# Altium PCB main_btm.PcbDoc
Units mil, origin at the board's own origin, x right, y up, seen from the top; angles counter-clockwise.
Board outline 2360 x 2360 mil, 2 copper layers (Top Layer, Bottom Layer); 35 components, 28 nets, 133 pads, 30 vias.
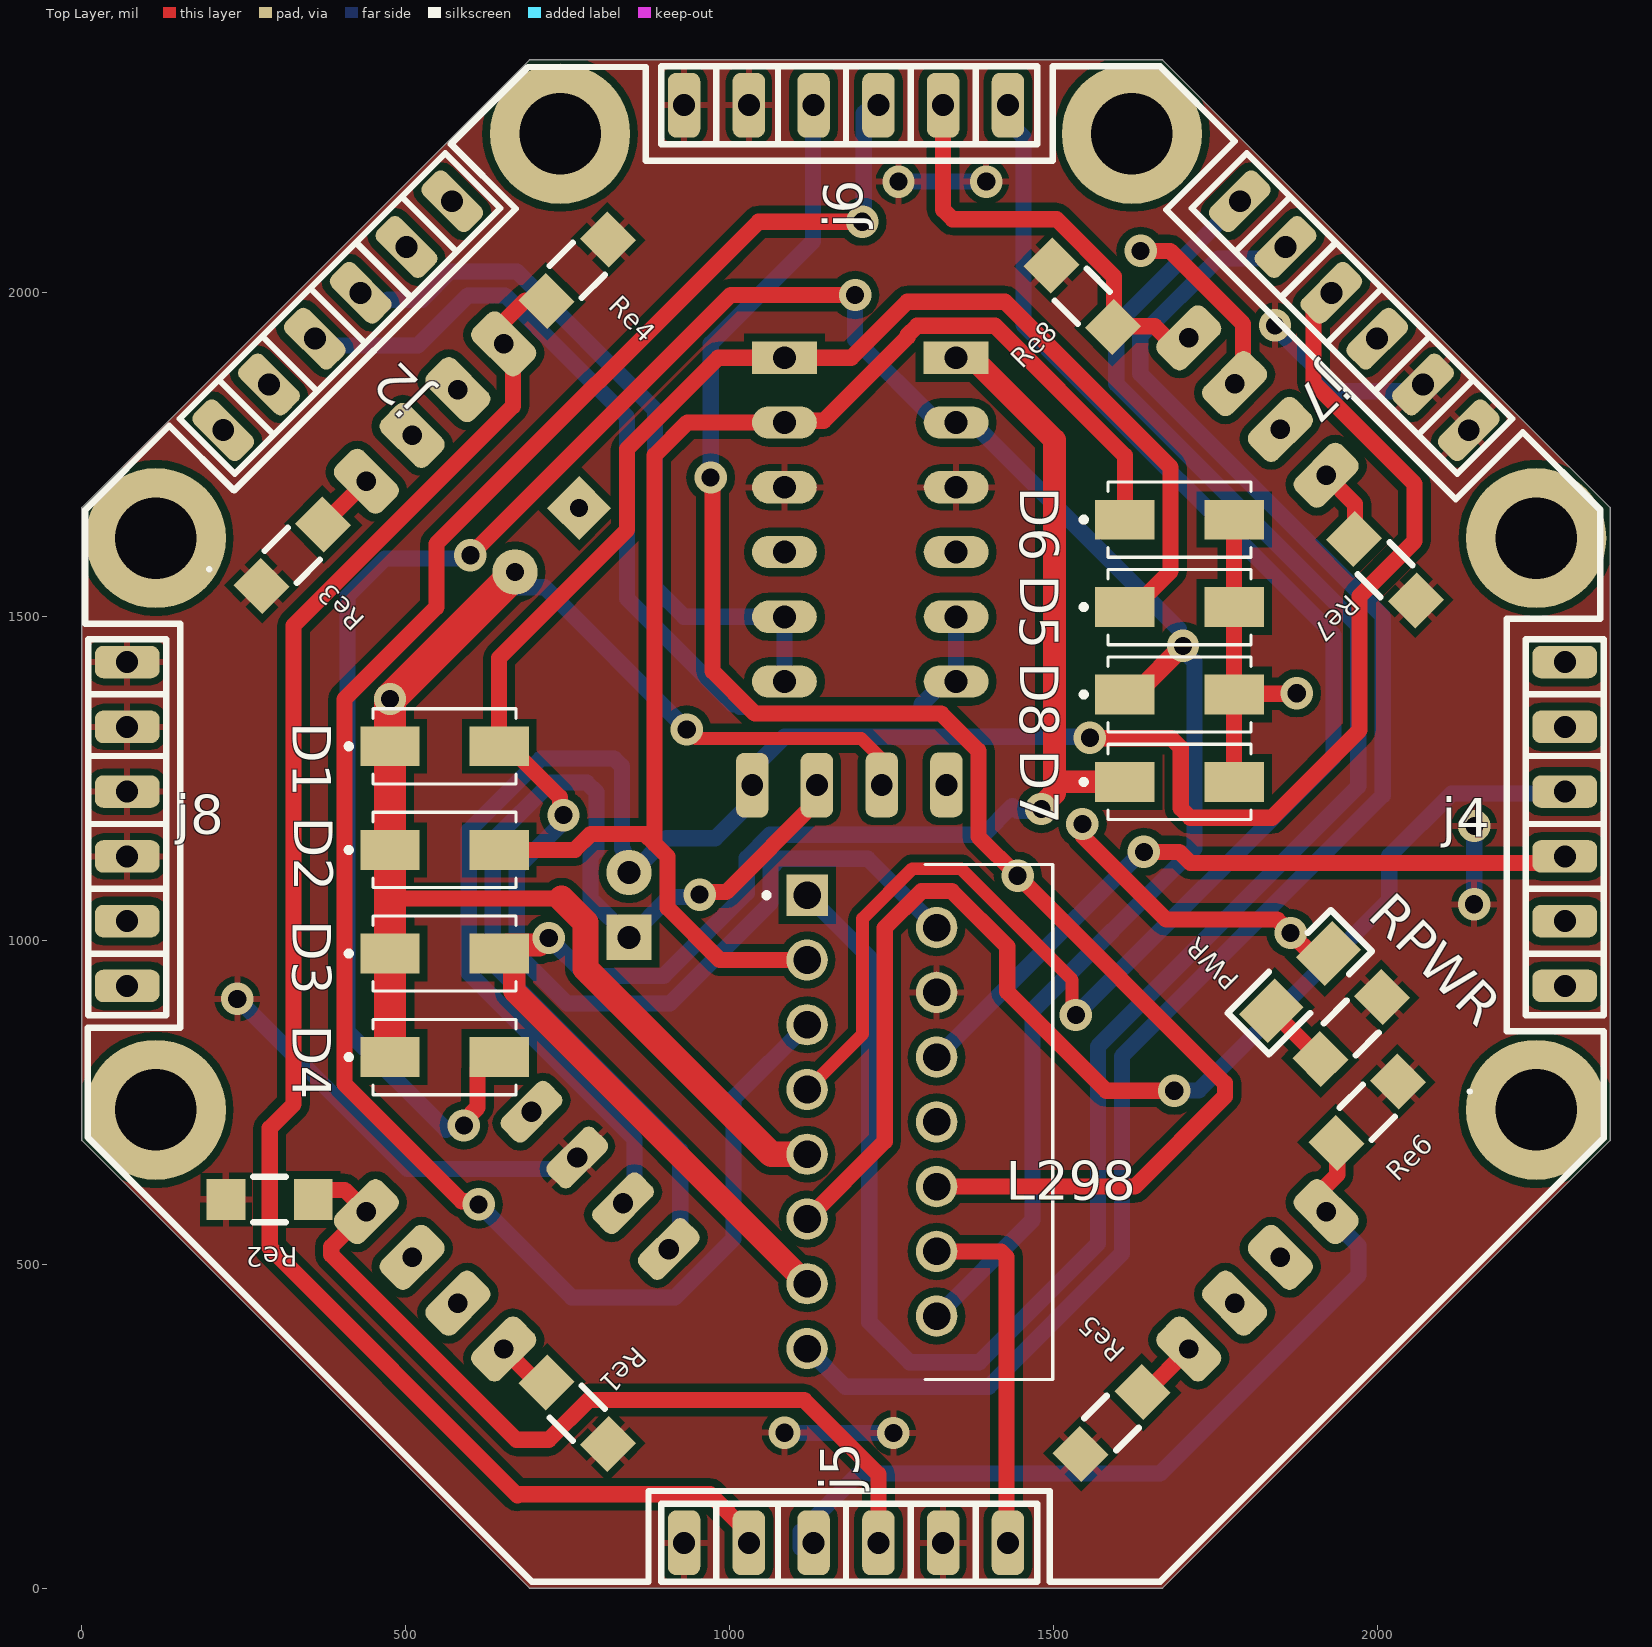
[diagram p0: Top Layer view]
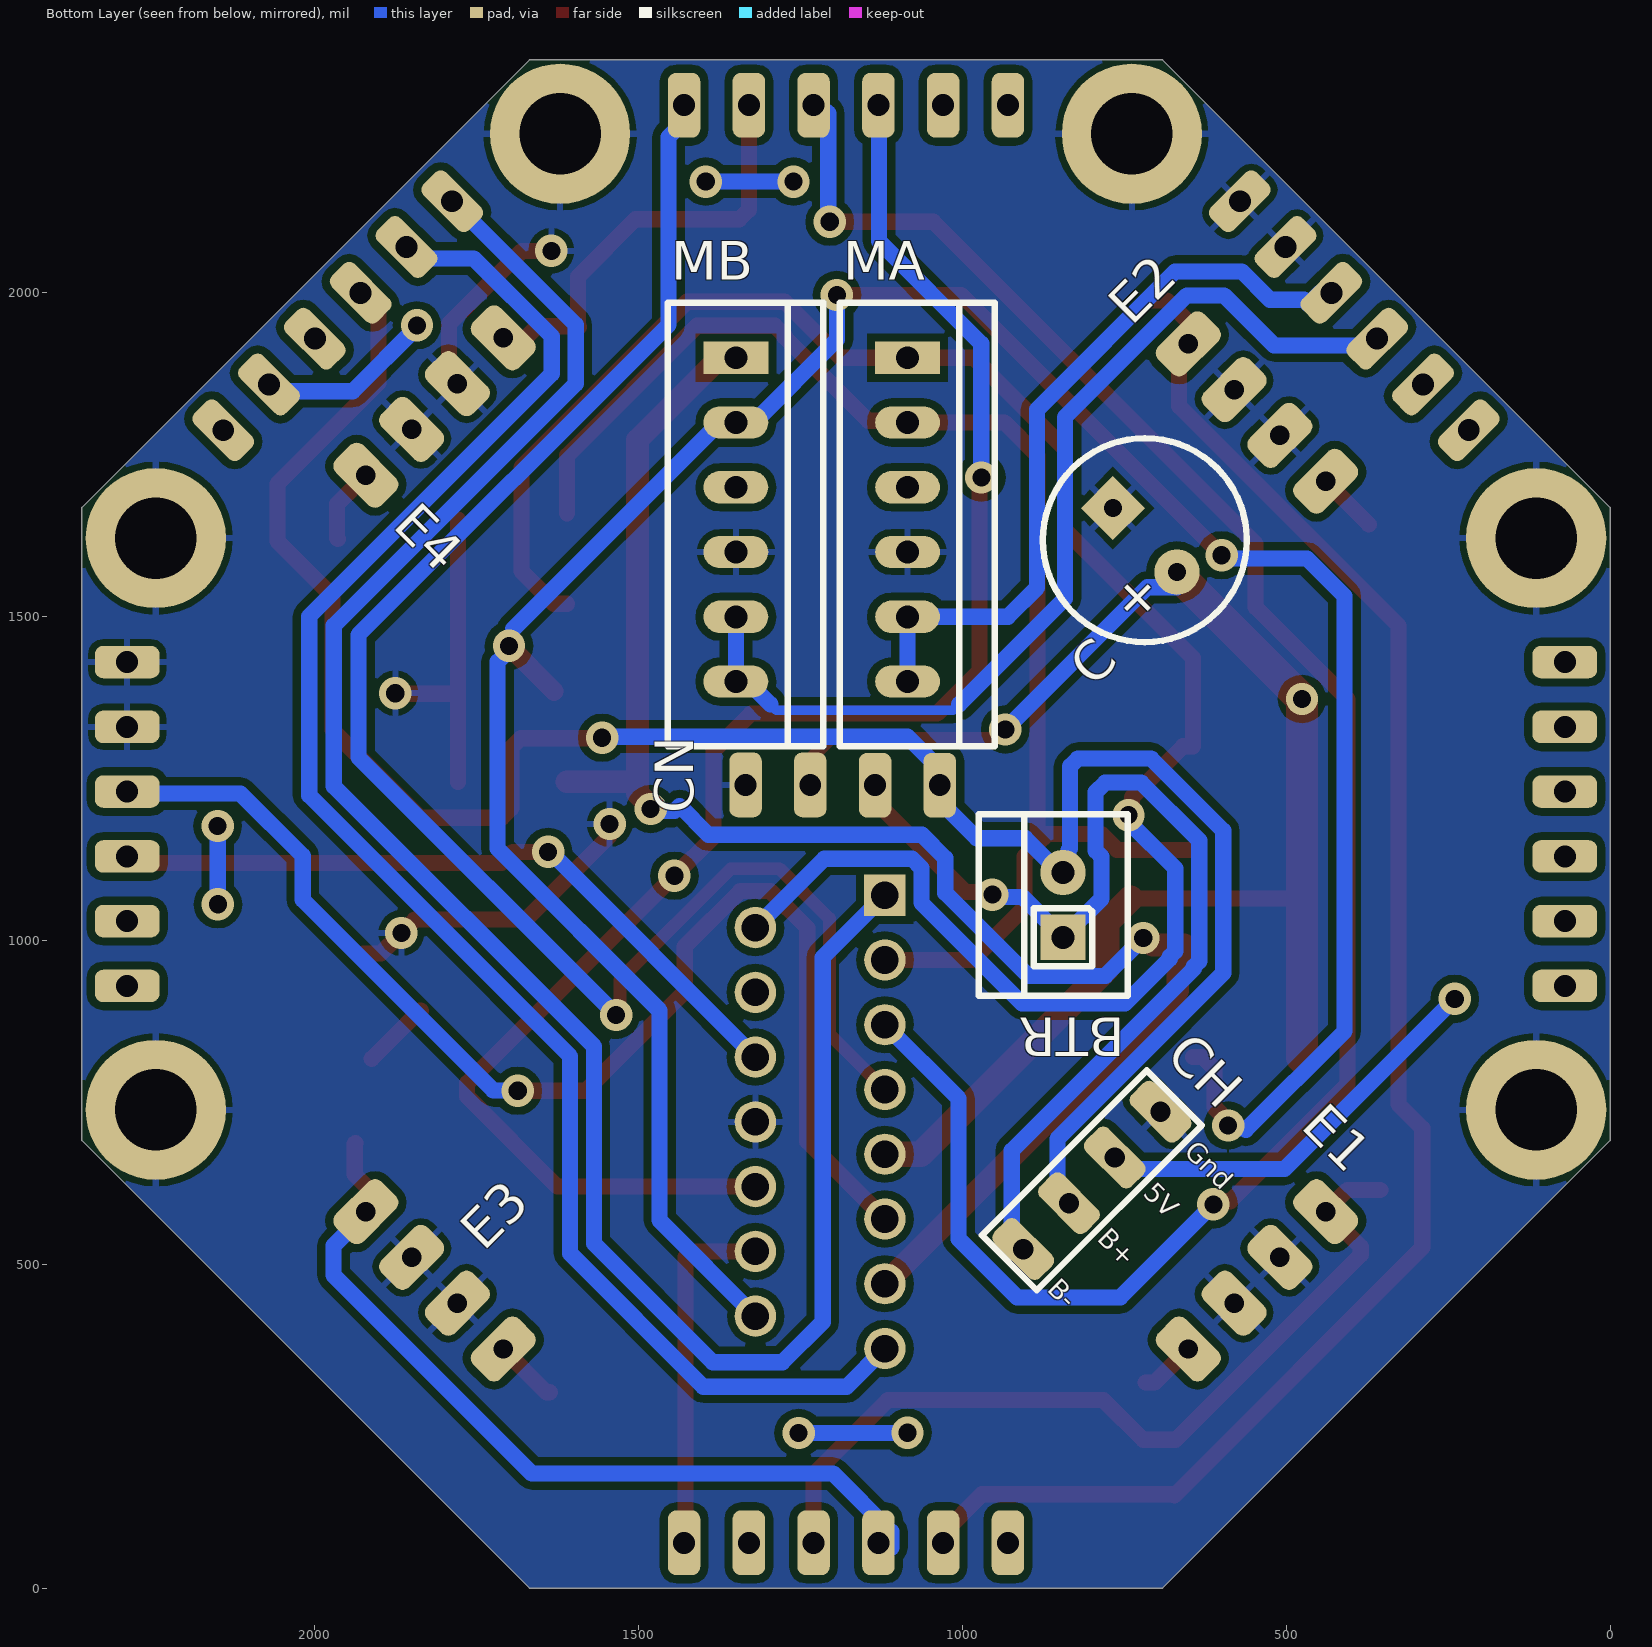
[diagram p1: Bottom Layer view, seen from below]

## Layer stack, top to bottom
Top Solder: solder mask 0.4, Solder Resist, Dk 3.5
Top Layer: signal copper 1.4
Dielectric 1: dielectric 12.6, FR-4, Dk 4.8
Bottom Layer: signal copper 1.4
Bottom Solder: solder mask 0.4, Solder Resist, Dk 3.5

## Board outline
0,691.23 0,1668.77 691.23,2360 1668.77,2360 2360,1668.77 2360,691.23 1668.77,0 691.23,0

## Design rules (kind name [scope] priority, off if disabled: settings)
Clearance Clearance_2 [OnLayer('Bottom Overlay')] p1: gap=1 ignorepadtopadclearanceinfootprint=FALSE
Clearance Clearance_1 [OnLayer('Top Overlay')] p2: gap=1 ignorepadtopadclearanceinfootprint=FALSE
Clearance [All] p3: gap=12 ignorepadtopadclearanceinfootprint=FALSE except(18: Fill-Hole Poly-Hole Region-Hole)
PolygonConnect [All] p1: connectstyle=Relief reliefconductorwidth=10 reliefentries=4 polygonreliefangle="90 Angle" airgapwidth=10
RoutingTopology [All] p1: topology=Daisy_Simple
RoutingVias [All] p1: holewidth=28 width=50 viastyle="Through Hole" minholewidth=28 minwidth=50 maxholewidth=28 maxwidth=50
SolderMaskExpansion [All] p1: expansion=4 istentingtop=FALSE
Width [InNet('Vss')] p1: maxlimit=100 minlimit=15 preferedwidth=15 minimp=50.000000 maximp=50.000000 favimp=50.000000
29 further rules are at their usual default settings.

## Classes and differential pairs
component class Encoder_Sheet: E1 E2 E3 E4 Re1 Re2 Re3 Re4 Re5 Re6 Re7 Re8
component class Power_Sheet: BTR CH CN PWR RPWR
component class Motors_Sheet: C D1 D2 D3 D4 D5 D6 D7 D8 L298 MA MB

## Components (designator, comment, footprint, x,y, rotation, side; value= is the part's Value field where it differs from the comment)
BTR "JST_B2B" JST_B2B 845,1105 r0 bottom
C "cap_elec8115" CAP_8115 668.93,1568.93 r45 bottom value=220uF
CH "charger" 1S_Charger 461,78.16 r225 bottom
CN "DC-DC Converter" "DC-DC Conv" 1035.18,1240 r90 bottom
D1 "M7" 1N4007 560,1300 r270 top
D2 "M7" 1N4007 560,1140 r270 top
D3 "M7" 1N4007 560,980 r270 top
D4 "M7" 1N4007 560,820 r270 top
D5 "M7" 1N4007 1695,1515 r270 top
D6 "M7" 1N4007 1695,1650 r270 top
D7 "M7" 1N4007 1695,1245 r270 top
D8 "M7" 1N4007 1695,1380 r270 top
E1 "100th" pin4header 651.42,369.29 r135 bottom
E2 "100th" pin4header 439.29,1709.29 r45 bottom
E3 "100th" pin4header 1709.29,369.29 r45 bottom
E4 "100th" pin4header 1921.42,1718.58 r135 bottom
j2 "100th" pin6header 571.89,2141.67 r135 top
j4 "100th" pin6header 2290,930 r0 top
j5 "100th" pin6header 1430,70 r90 top
j6 "100th" pin6header 1430,2290 r90 top
j7 "100th" pin6header 1788.11,2141.65 r225 top
j8 "100th" pin6header 70,930 r0 top
L298 "L298N" L298N 1120,1070 r0 top
MA "JST_B6B" JST_B6B 1085,1400 r180 bottom
MB "JST_B6B" JST_B6B 1350,1400 r180 bottom
PWR "3.2x1.6" LED3_2X1_6 1925,980 r225 top
Re1 "1206" 1206 765,270 r315 top value=220
Re2 "1206" 1206 290,600 r180 top
Re3 "1206" 1206 325,1595 r225 top value=220
Re4 "1206" 1206 765,2035 r45 top
Re5 "1206" 1206 1590,255 r225 top value=220
Re6 "1206" 1206 1985,735 r45 top
Re7 "1206" 1206 2012.4,1572.6 r315 top value=220
Re8 "1206" 1206 1545,1995 r135 top
RPWR "1206" 1206 1960,865 r45 top value=220

## Footprints (in the part's own frame and the unit in brackets; to place one, negate y for a bottom-side part, rotate by r counter-clockwise, add the part's x,y. Pads: shape width x height; smd on the part's side, far side on the other; paste and mask are expansions set on the pad)
1N4007 [mm]
  rect 1.56x2.33 smd: A(0,2.14) C(0,-2.14)
  silkscreen extent -1.48,-3.85 1.48,2.8, body extent -1.56,-2.65 1.55,2.65, height 2.47
1S_Charger [mm]
  rrect50% 2.54x1.27 hole 0.8: B+(-16,2.54) B-(-16,0) GND(-16.002,7.62) Vout(-16,5.08)
  silkscreen extent -17.53,-0.76 -14.48,8.38
1206 [mm]
  rect 1.52x1.6 smd: 1(-1.71,0) 2(1.71,0)
  silkscreen extent -0.63,-0.89 0.63,0.89, body extent -1.6,-0.8 1.6,0.8, height 0.7
CAP_8115 [mil]
  rect 70x70 hole 27.56: neg(140,0)
  round 70 hole 27.56: pos(0,0)
  silkscreen extent -87,-157 227,157, body extent -87,-157 227,157, height 453
"DC-DC Conv" [mm]
  rrect50% 2.54x1.27 hole 0.86: B+(0,0) B-(0,2.535) Vout+(0.01,5.08) Vout-(0.01,7.615)
  body extent -1.27,-1.27 1.27,8.89, height 8.38
JST_B2B [mil]
  round 70 hole 35.43: 1(0,0)
  rect 70x70 hole 35.43: 2(0,100)
  silkscreen extent -100,-90 130,190, body extent -98,-91 132,191, height 284
JST_B6B [mm]
  rrect100% 2.54x1.27 hole 0.9: 1(0,0) 2(0,2.54) 3(0,5.08) 4(0,7.62) 5(0,10.16)
  rect 2.54x1.27 hole 0.9: 6(0,12.7)
  silkscreen extent -2.67,-2.54 3.43,14.86, body extent -2.54,-2.41 3.3,14.76, height 7.21
L298N [mm]
  rect 1.62x1.62 hole 1.08: 1(0,0)
  round 1.62 hole 1.08: 2(5.08,-1.27) 3(0,-2.54) 4(5.08,-3.81) 5(0,-5.08) 6(5.08,-6.35) 7(0,-7.62) 8(5.08,-8.89) 9(0,-10.16) 10(5.08,-11.43) 11(0,-12.7) 12(5.08,-13.97) 13(0,-15.24) 14(5.08,-16.51) 15(0,-17.78)
  silkscreen extent -1.69,-18.99 9.63,1.21, body extent -0.25,-19.05 9.64,1.15, height 20.68
LED3_2X1_6 [mm]
  rect 2x1.6 smd: a(3.175,0) c(0,0)
  silkscreen extent -1.27,-1.14 4.45,1.14, body extent -0.08,-0.8 3.12,0.8, height 1.1
pin4header [mil]
  rrect50% 60x100 hole 30: 1(0,0) 2(100,0) 3(200,0) 4(300,0)
  body extent -50,-50 350,50, height 98
pin6header [mm]
  rrect50% 2.54x1.27 hole 0.86: 1(0,0) 2(0,2.54) 3(0,5.08) 4(0,7.62) 5(0,10.16) 6(0,12.7)
  silkscreen extent -1.52,-1.14 1.52,13.59, body extent -1.2,-1.4 1.2,13.84, height 8.35

## Part data
D1 D2 D3 D4 D5 D6 D7 D8: library part 1N4007
E1 E2 E3 E4: library part Pin4Header
j2 j4 j5 j6 j7 j8: library part pin6header, System=Connector
PWR: library part led

## Free pads (board coordinates)
  round 216.54 hole 125.98: c(114.17,738.52) c(114.17,1621.48) c(738.52,2245.83) c(1621.48,2245.83) c(2245.83,738.52) c(2245.83,1621.48)

## Via types
v1: diameter 50, hole 28, Top Layer to Bottom Layer, 30 vias

## Nets (pads, with @x,y where several pads share a name; then routed paths per layer and width w, separated by ;. In a path a pad name is that pad's centre, name@x,y a point inside that pad or via, vN(x,y) a via of type N, cw(c..) or ccw(c..) an arc to the next point about the centre after c; other vN are vias at no path point)
+5: CH.Vout j5.2 j5.6 j6.5 j6.6 j7.5 j7.6 j8.3 j8.4 j8.5 j8.6 L298.4 MA.4 MB.4 Re1.2 Re2.2 Re3.2 Re4.2 Re5.2 Re6.2 Re7.2 Re8.2 RPWR.2 | length 1342.6
  Bottom Layer w25: v1(240,910) 502.68,647.32 747.32,647.32 CH.Vout ; v1(1085,240) 1085.25,239.75 1252.92,239.75 v1(1253.17,239.5) ; v1(1261,2172) v1(1396.5,2172) ; v1(1842.5,1950) 1842.5,1947.5 1941.8,1848.2 2060.34,1848.2 j7.5 ; v1(2150,1056) 2150.18,1056.18 2150.18,1176.82 v1(2150.36,1177)
B+: BTR.1 CH.B+ CN.B+ j7.3 | length 3324.2
  Top Layer w25: v1(1556.54,1313.24) 1557.34,1312.44 1682.36,1312.44 1697,1297.8 1697,1204.44 1711.64,1189.79 1837.79,1189.79 1973,1325 1973,1532 2057.88,1616.88 2057.88,1705.12 1901.9,1861.1 1901.9,1972.61 j7.3@1919.57,1990.28
  Bottom Layer w25: CH.B+ 853.39,611.97 853.39,693.96 597.5,949.85 597.5,1169.83 708.67,1281 822.25,1281 834,1269.25 834,1142.14 836.39,1139.76 836.39,1113.61 BTR.1 849.83,1105 902.88,1158.05 978.23,1158.05 1035.18,1215 CN.B+ 1035.18,1265 1085.06,1314.88 1554.9,1314.88 v1(1556.54,1313.24)
GND: C.neg CH.GND CN.Vout- D5.A D6.A D7.A D8.A E1.2 E1.3 E2.2 E2.3 E3.2 E3.3 E4.2 E4.3 j2.1 j2.2 j4.5 j4.6 L298.8 MA.3 MB.3 pad.c PWR.c | length 1315.3
  Top Layer w25: j2.1 j2.1@589.57,2123.99 ; E2.3 E2.3@594.85,1836.57 ; v1(1545,1180) 1545,1162 1674.62,1032.38 1845.93,1032.38 ; v1(1635,2065) 1680.36,2065 1793,1952.36 1793,1927 1793.19,1926.81 1793.19,1873.19 E4.3 ; D7.A D8.A D5.A D6.A ; D8.A@1781.75,1382.5 1783.09,1381.16 1875.16,1381.16 v1(1876,1382) ; v1@1851.43,1026.88 v1(1866.61,1011.7) ; v1@1869.99,1015.08 1869.99,1008.32 1898.31,980 PWR.c
NetBTR_2: BTR.2 CH.B- CN.B- | length 1616.1
  Top Layer w25: v1(954,1071.03) 957.75,1074.78 994.78,1074.78 1135,1215 CN.B-
  Bottom Layer w25: CH.B- 924.1,541.26 924.1,675.58 643,956.67 643,959.67 634.5,968.17 634.5,1154.5 724,1244 779.86,1244 794.5,1229.36 794.5,1138.65 785.5,1129.65 785.5,1064.5 BTR.2 907.5,1067.5 950.47,1067.5 v1(954,1071.03)
NetD1_A: D1.A D5.C L298.2 MA.6 | length 3080.3
  Top Layer w25: v1(743.75,1193.75) 738.22,1199.28 738.22,1221.19 659.41,1300 D1.A 644.25,1436.58 841.92,1634.25 841.92,1759.25 982.67,1900 MA.6 1188.03,1900 1274.53,1986.5 1425.47,1986.5 1681.11,1730.86 1681.11,1570.21 1630.91,1520 D5.C@1610.75,1520
  Bottom Layer w25: v1(743.75,1193.75) 743.75,1183.75 671.5,1111.5 671.5,983.5 680,975 680,972 749,903 908.3,903 1063.61,1058.31 1063.61,1112.04 1077.96,1126.39 1213.61,1126.39 L298.2
NetD2_A: D2.A D6.C L298.3 MA.5 | length 2195.3
  Top Layer w25: D2.A 761.38,1140 785.88,1164.5 869.65,1164.5 884.5,1149.65 ; L298.3 985,970 904.5,1050.5 904.5,1129.65 886,1148.15 884.5,1149.65 ; D6.C@1610.75,1660 1610.75,1748.9 1410.15,1949.5 1289.85,1949.5 1275.5,1935.15 1275.5,1932.5 1145.69,1802.69 1087.69,1802.69 MA.5 935,1800 884.5,1749.5 884.5,1149.65
NetD3_A: D3.A D7.C L298.13 MB.6 | length 2620.7
  Top Layer w35: v1(721,1004) 716.94,1004 706.15,993.21 657.46,993.21 D3.A 654.33,980 667.54,966.79 667.54,922.46 L298.13 ; MB.6 1357.5,1892.5 1382.5,1892.5 1502.04,1772.96 1502.04,1245 ; v1(1481.75,1203.25) 1481.75,1207.31 1502.04,1227.59 1502.04,1245 ; D7.C 1502.04,1245
  Bottom Layer w25: v1(721,1004) 779.5,945.5 898.47,945.5 1026.61,1073.64 1026.61,1127.36 1062.64,1163.39 1392.41,1163.39 1437.02,1208 1444.73,1200.28 1478.78,1200.28 v1(1481.75,1203.25)
NetD4_A: D4.A D8.C L298.14 MB.5 | length 4120.2
  Top Layer w25: v1(590,714.5) 590,721.26 610.89,742.15 610.89,801.79 629.09,820 D4.A ; v1(600,1595) 1002,1997 v1(1194,1997) ; v1@1700.5,1454.59 v1(1700.5,1455)
  Top Layer w30: D8.C@1630.91,1385 v1@1700.5,1454.59
  Bottom Layer w15: 1693.8,1481.2 1693.8,1461.7 v1(1700.5,1455)
  Bottom Layer w25: v1(590,714.5) 585.22,709.72 564.51,709.72 562.39,707.61 410,860 410,1532 468.22,1590.22 595.22,1590.22 v1(600,1595) ; v1(1194,1997) 1194,1928 1322,1800 MB.5 1375,1800 1693.8,1481.2 ; L298.14 1468,568 1468,892 1718,1142 1718,1430.73 1700.5,1448.23 v1(1700.5,1455)
NetE1_1: E1.1 Re1.1 | length 87.4
  Top Layer w25: E1.1 703.11,317.6 Re1.1
NetE1_4: E1.4 j5.3 Re2.1 | length 1329.1
  Top Layer w25: Re2.1@355,615 405.71,615 E1.4 385.15,527.28 385.15,514.85 671,229 721,229 782.32,290.32 1115.53,290.32 1230,175.86 j5.3
NetE2_1: E2.1 Re3.1 | length 94.3
  Top Layer w25: Re3.1 E2.1
NetE2_4: E2.4 j5.5 Re4.1 | length 2616.8
  Top Layer w25: E2.4@617.54,1938.39 634.45,1938.39 684.57,1988.51 716.28,1988.51 Re4.1 ; E2.4 665.56,1907.28 665.56,1825.22 327,1486.66 327,747.32 290,710.32 290,526 672.5,143.5 674,145 970,145 1030,85 j5.5
NetE3_1: E3.1 Re5.1 | length 99.3
  Top Layer w25: Re5.1 1642.6,302.6 E3.1
NetE3_4: E3.4 j5.4 Re6.1 | length 1286.6
  Top Layer w25: E3.4 1916.89,585.95 1916.89,616.96 1938.51,638.58 1938.51,686.28 Re6.1
  Bottom Layer w25: j5.4@1110,62.34 1110,87.34 1199.66,177 1665.29,177 1971.42,483.13 1971.42,528.89 1921.42,578.89 E3.4
NetE4_1: E4.1 Re7.1 | length 117.3
  Top Layer w25: E4.1 1965.9,1674.1 1965.9,1621.32 Re7.1
NetE4_4: E4.4 j6.2 Re8.1 | length 673.5
  Top Layer w25: j6.2 1330,2128.64 1344.64,2114 1505.19,2114 1593.72,2025.47 Re8.1@1593.72,1948.51 ; Re8.1 Re8.1@1593.72,1948.51 ; E4.4 1704.18,1925.6 1679.7,1925.6 1656.79,1948.51 Re8.1@1593.72,1948.51
Netj4_3: j4.3 L298.6 | length 1098.3
  Top Layer w25: v1(1640,1137) 1694.76,1137 1711.76,1120 j4.3@2280,1120
  Bottom Layer w25: L298.6 1637,1137 v1(1640,1137)
Netj4_4: j4.4 L298.11 | length 1972.7
  Top Layer w25: L298.11 1239.86,689.86 1239.86,1019.61 1296.64,1076.39 1343.36,1076.39 1428.93,990.82 1428.93,921.07 1582,768 v1(1686.9,768)
  Bottom Layer w25: v1(1686.9,768) 1687.55,768.65 1724.65,768.65 2019,1063 2019,1131 2115,1227 2287,1227 j4.4
Netj5_1: j5.1 L298.12 | length 553.7
  Top Layer w25: L298.12 1419.21,520 1428,511.21 1428,72 j5.1
Netj6_1: j6.1 L298.7 | length 2561
  Top Layer w20: L298.7 1205.36,855.36 1205.36,1033.9 1282.35,1110.89 1357.65,1110.89 1529.26,939.28 1529.26,890.74 v1(1535,885)
  Bottom Layer w25: j6.1 1430,2265 1454,2241 1454,1950.99 1933,1471.99 1933,1283 v1(1535,885)
Netj6_3: j6.3 L298.5 | length 3081
  Top Layer w25: v1(612.63,592.63) 607.85,597.41 586.59,597.41 405.38,778.62 405.38,1372.7 547.5,1514.82 547.5,1612.5 1045,2110 v1(1205,2110)
  Bottom Layer w25: v1(612.63,592.63) 756.26,449 916,449 1006.33,539.33 1006.33,756.33 L298.5 ; v1(1205,2110) 1207.5,2112.5 1207.5,2277.5 j6.3@1210,2280
Netj6_4: j6.4 L298.10 | length 2581.2
  Top Layer w25: v1(971,1715) 974,1712 974,1416 1039.5,1350.5 1327.2,1350.5 1384.5,1293.2 1384.5,1160.5 v1(1445,1100) 1765.14,779.86 1765.14,759.14 1626,620 L298.10
  Bottom Layer w25: v1(971,1715) 971,1921.86 1129,2079.86 j6.4@1129,2274.69
Netj7_1: j7.1 L298.1 | length 3149.2
  Bottom Layer w25: L298.1 1216,974 1216,411 1278.14,348.86 1385.86,348.86 1569,532 1569,836.42 1971,1238.42 1971,1486.31 1597.43,1859.88 1597.43,1950.99 j7.1@1778.15,2131.71
Netj7_2: j7.2 L298.15 | length 2601.4
  Bottom Layer w25: L298.15 1179,311 1400.33,311 1606,516.67 1606,821.09 2009,1224.09 2009,1500.64 1634.43,1875.2 1634.43,1932.93 1754.76,2053.26 1841.13,2053.26 j7.2@1848.86,2061
NetPWR_A: PWR.a RPWR.1 | length 106.5
  Top Layer w25: PWR.a 1838.18,891.61 RPWR.1
PM1: j2.3 MA.1 MA.2 | length 1164.8
  Bottom Layer w25: j2.3 448.15,2000.25 465.83,1982.57 472.9,1989.64 525.22,1989.64 568.86,2033.28 671.72,2033.28 885,1820 885,1545 930,1500 MA.2 MA.1
PM2: j2.4 MB.1 MB.2 | length 1574.5
  Bottom Layer w15: 1005,1365 1014.5,1355.5 1287.26,1355.5 1296.76,1365
  Bottom Layer w25: j2.4 370.37,1918.93 518.93,1918.93 596.28,1996.28 653.64,1996.28 841.92,1807.99 841.92,1528.08 1005,1365 ; 1296.76,1365 1331.76,1400 MB.1 MB.2
Vss: C.pos CN.Vout+ D1.C D2.C D3.C D4.C L298.9 | length 2354.4
  Top Layer w20: v1(934,1326) 948,1312 1203.56,1312 CN.Vout+@1235.18,1280.38
  Top Layer w25: 475.75,1065 740.61,1065
  Top Layer w40: 740.61,1065 778,1027.61 778,956.75 1064.75,670 L298.9
  Top Layer w50: D4.C D3.C 475.75,1065 D2.C D1.C v1(475.75,1373.07) 668.93,1566.25 C.pos
  Bottom Layer w25: C.pos@668.93,1545.5 714.5,1545.5 v1(934,1326)
pads on no net: j2.5 j2.6 j4.1 j4.2 j7.4 j8.1 j8.2

## Polygon pours and split planes (outlines as drawn)
GND on Bottom Layer "btm gnd" (solid, pour order 1): 0,1668.77 691.23,2360 1668.77,2360 2360,1668.77 2360,691.23 1668.77,0 691.23,0 0,691.23
+5 on Top Layer "top5v" (solid, pour order 0): 0,1668.77 691.23,2360 1668.77,2360 2360,1668.77 2360,691.23 1668.77,0 691.23,0 0,691.23

## Silkscreen, mask and mechanical layers (free items; w line width, h text height)
Top Overlay:
  lines w10: 5,1489 5,1665 135,1795 235,1695 670,2130 570,2230 689,2349 871,2349 871,2204 1499,2204 1499,2350 1665,2350 1780.5,2234.5 1674.5,2128.5 2121.5,1681.5 2225,1785 2345,1665 2345,1497 2200,1497 2200,860 2350,860 2350,695 1665,10 1495,10 1495,150 875,150 875,10 695,10 9,696 9,865 152,865 152,1489 5,1489 ; 196.85,1573.09 196.85,1573.09 ; 2143.15,766.91 2143.15,766.91

## Text inside footprints (layer, text, board x,y; h text height)
C: Bottom Overlay "+" at 686.62,1522.97 h60 r225
CH: Bottom Overlay "5V" at 722.63,608.49 h30 r45; Bottom Overlay "Gnd" at 658.99,672.13 h30 r45; Bottom Overlay "B+" at 793.34,537.78 h30 r45; Bottom Overlay "B-" at 871.12,459.99 h30 r45